# EAGLE board MCU board ATmega328p v3.1 (SN) RevC (EAGLE 9.2.1)
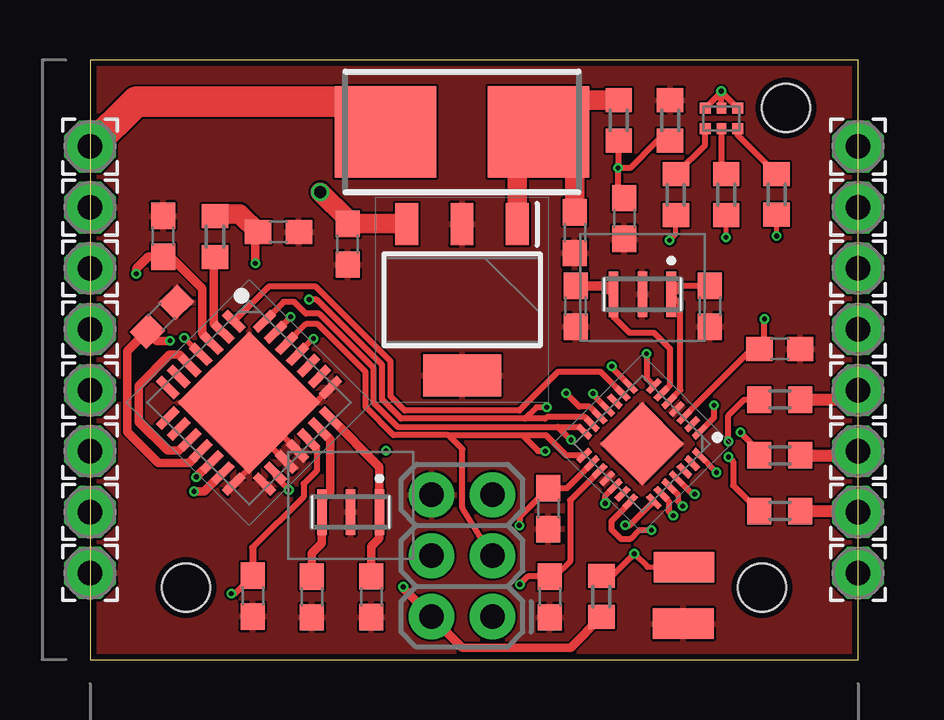
[diagram p0: board, top side]
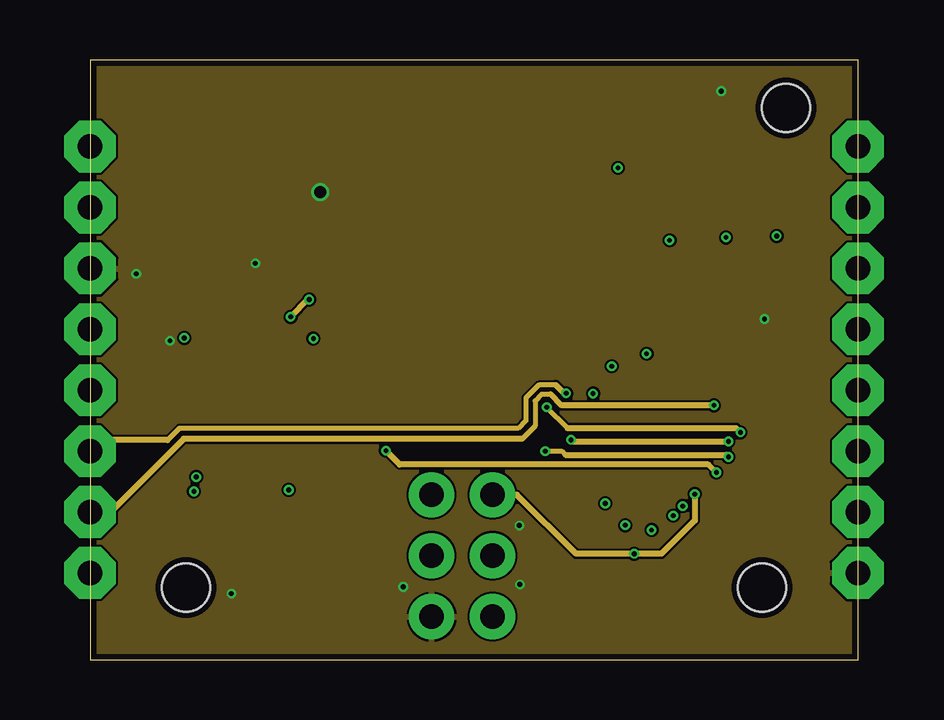
[diagram p1: board, inner layer Route2]
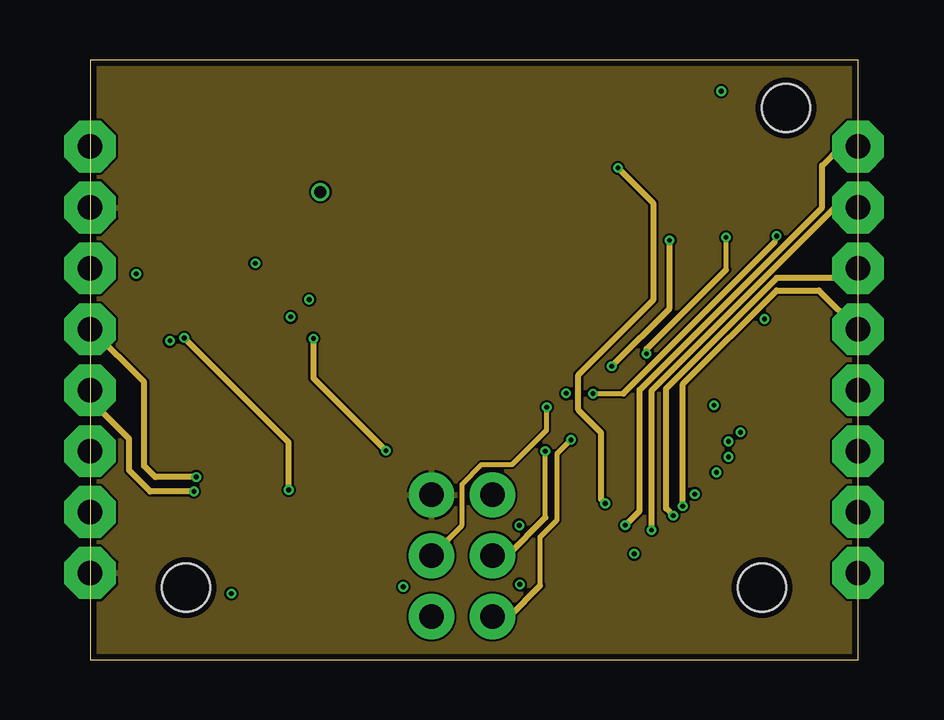
[diagram p2: board, inner layer Route15]
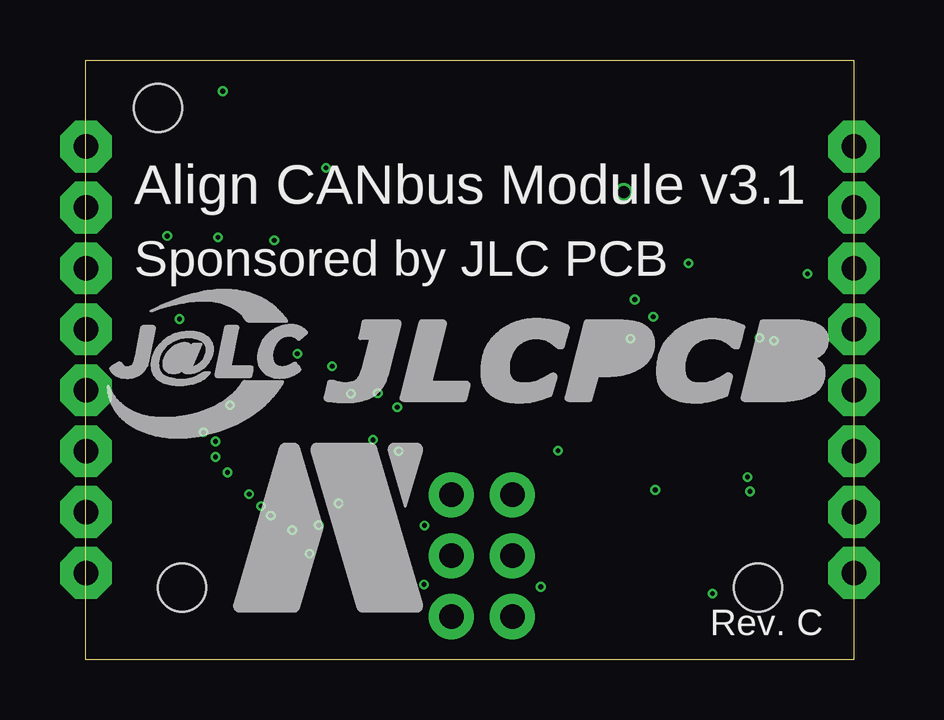
[diagram p3: board, bottom side, seen from below]

Size 32 x 25 mm. Coordinates in mm from the lower left corner, seen from the top.
Outline: 0,0 32,0 32,25 0,25 0,0
Copper layers (1+2*15+16): Top 0.035mm / dielectric 0.365mm / Route2 0.017mm / dielectric 0.365mm / Route15 0.017mm / dielectric 0.365mm / Bottom 0.035mm
Design rules "default *": minimum track width 3.5mil, minimum drill 0.2mm, track to track 3.5mil, track to pad 6mil, pad to pad 6mil, via to via 6mil, smd to smd 6mil, copper to edge 10mil, drill to drill 6mil, minimum pad ring 4mil, minimum via ring 4mil, stop-mask expansion 4mil, vias tented up to drill 25mil, thermal gap 4mil
Holes 2 mm at 28,3 4,3 29,23

## Footprints (pad centres in the part's own frame; a part is rotated, then mirrored left to right if it is on the bottom)
2,15/1,0 = drill 1.016 pad 2.159 octagon: 1 0,0
C0603 = smd 1.1 x 1: 1 -0.85,0; 2 0.85,0
0154001.DRT = smd 4.242 x 3.81: 1 -3.188,0; 2 3.188,0
QFN45P400X400X100-29N = smd 0.7 x 0.25: 1 -2.05,1.35; 2 -2.05,0.9; 3 -2.05,0.45; 4 -2.05,0; 5 -2.05,-0.45; 6 -2.05,-0.9; 7 -2.05,-1.35; 15 2.05,-1.35; 16 2.05,-0.9; 17 2.05,-0.45; 18 2.05,0; 19 2.05,0.45; 20 2.05,0.9; 21 2.05,1.35 | smd 0.25 x 0.7: 8 -1.35,-2.05; 9 -0.9,-2.05; 10 -0.45,-2.05; 11 0,-2.05; 12 0.45,-2.05; 13 0.9,-2.05; 14 1.35,-2.05; 22 1.35,2.05; 23 0.9,2.05; 24 0.45,2.05; 25 0,2.05; 26 -0.45,2.05; 27 -0.9,2.05; 28 -1.35,2.05 | smd 2.45 x 2.45: 29 0,0
SOT230P700X170-4N = smd 1.75 x 0.95: 1 -3.15,2.3; 2 -3.15,0; 3 -3.15,-2.3 | smd 1.75 x 3.25: 4 3.15,0
QFN65P600X600X100-29N = smd 1.05 x 0.35: 1 -2.85,1.95; 2 -2.85,1.3; 3 -2.85,0.65; 4 -2.85,0; 5 -2.85,-0.65; 6 -2.85,-1.3; 7 -2.85,-1.95; 15 2.85,-1.95; 16 2.85,-1.3; 17 2.85,-0.65; 18 2.85,0; 19 2.85,0.65; 20 2.85,1.3; 21 2.85,1.95 | smd 0.35 x 1.05: 8 -1.95,-2.85; 9 -1.3,-2.85; 10 -0.65,-2.85; 11 0,-2.85; 12 0.65,-2.85; 13 1.3,-2.85; 14 1.95,-2.85; 22 1.95,2.85; 23 1.3,2.85; 24 0.65,2.85; 25 0,2.85; 26 -0.65,2.85; 27 -1.3,2.85; 28 -1.95,2.85 | smd 4.2 x 4.2: 29 0,0
2X3-NS = drill 1.016 pad 1.88: 1 -2.54,-1.27; 2 -2.54,1.27; 3 0,-1.27; 4 0,1.27; 5 2.54,-1.27; 6 2.54,1.27
ROHM-1510-(0604) = smd 0.45 x 0.45: 1 -0.675,-0.425; 3 0.675,-0.425; 4 0.675,0.425; 6 -0.675,0.425 | smd 0.4 x 0.45: 2 0,-0.425; 5 0,0.425
R0603 = smd 1 x 1.1: 1 -0.85,0; 2 0.85,0
SMD1,27-2,54 = smd 1.27 x 2.54: 1 0,0
CSTNE16M0V530000R0 = smd 0.4 x 1.9: 1 -1.2,0.425; 2 0,0.425; 3 1.2,0.425

## Placement (x,y rotation side)
5V  5V_V5  [2,15/1,0]  0,16.31 0 top
5V1  5V_H0  [2,15/1,0]  32,3.61 0 top
12V  12V_V7  [2,15/1,0]  0,21.39 0 top
C1  0.1uF  [C0603]  22.27,18.39 270 top
C2  22pF  [C0603]  9.24,2.61 270 top
C3  22pF  [C0603]  25.83,14.73 270 top
C5  22pF  [C0603]  11.72,2.62 270 top
C6  0.1uF  [C0603]  7.85,17.82 0 top
C7  0.1uF  [C0603]  6.78,2.65 270 top
C8  0.1uF  [C0603]  2.99,14.29 45 top
C9  22pF  [C0603]  20.23,14.73 270 top
C10  10uF  [C0603]  20.2,17.8 270 top
C11  10uF  [C0603]  10.73,17.32 270 top
C12  0.1uF  [C0603]  3.05,17.65 90 top
C13  0.1uF  [C0603]  19.16,2.61 270 top
C16  0.1uF  [C0603]  19.1,6.29 270 top
C17  0.1uF  [C0603]  28.75,12.95 0 top
CANH  I/O_CANH_V3  [2,15/1,0]  0,11.23 0 top
CANL  I/O_CANH_V4  [2,15/1,0]  0,13.77 0 top
FUSE  0154005.DRT  [0154001.DRT]  15.5,22 0 top
GND  GND_V6  [2,15/1,0]  0,18.85 0 top
GND30  GND_V0  [2,15/1,0]  0,3.61 0 top
I/O_AD0  I/O_AD0_H7  [2,15/1,0]  32,21.39 0 top
I/O_AD1  I/O_AD1_H6  [2,15/1,0]  32,18.85 0 top
I/O_ADC2_SDA  I/O_ADC2_SDA_H5  [2,15/1,0]  32,16.31 0 top
I/O_ADC3_SCL  I/O_ADC3_SCL_H4  [2,15/1,0]  32,13.77 0 top
IC1  ATMEGA328P-MMH  [QFN45P400X400X100-29N]  23,9 225 top
IC2  MIC5239-5.0YS_TR  [SOT230P700X170-4N]  15.5,15 270 top
IC3  MCP25625-E_ML  [QFN65P600X600X100-29N]  6.63,10.71 315 top
J1  AVR_SPI_PROG_3X2NS  [2X3-NS]  15.5,4.33 90 top
LED1  SMLP36RGB2W3R  [ROHM-1510-(0604)]  26.31,22.56 0 top
MISO  MISO_H3  [2,15/1,0]  32,11.23 0 top
MOSI  MOSI__H2  [2,15/1,0]  32,8.69 0 top
PWM0  PWM0_V2  [2,15/1,0]  0,8.69 0 top
PWM1_INT1  PWM0_INT_V1  [2,15/1,0]  0,6.15 0 top
R1  10kOhm  [R0603]  5.21,17.64 270 top
R2  200Ohm  [R0603]  24.41,19.38 90 top
R3  10kOhm  [R0603]  21.31,2.63 270 top
R4  290Ohm  [R0603]  26.51,19.39 90 top
R5  190Ohm  [R0603]  28.61,19.4 90 top
R6  200Ohm  [R0603]  28.75,6.19 0 top
R7  200Ohm  [R0603]  28.75,10.84 0 top
R8  200Ohm  [R0603]  28.75,8.51 0 top
R9  3kOhm  [R0603]  22.03,22.48 90 top
R10  2kOhm  [R0603]  24.17,22.48 270 top
RES_PAD1  RES_PAD  [SMD1,27-2,54]  24.75,3.86 270 top
RES_PAD2  RES_PAD2  [SMD1,27-2,54]  24.73,1.5 270 top
SCK  SCK_H1  [2,15/1,0]  32,6.15 0 top
U1  CSTNE16M0V530000R0  [CSTNE16M0V530000R0]  10.86,6.58 180 top
U2  CSTNE16M0V530000R0  [CSTNE16M0V530000R0]  23.02,15.66 180 top

## Library data of the parts
5V 5V1 12V CANH CANL GND GND30 I/O_AD0 I/O_AD1 I/O_ADC2_SDA I/O_ADC3_SCL MISO MOSI PWM0 PWM1_INT1 RES_PAD1 RES_PAD2 SCK = wirepad
C1-C3 C5-C13 C16 C17 = eagle-ltspice; SPICEMODEL: NONE; SPICEPREFIX: C
FUSE = 0154005(Fuseholder)DRT; ALLIED_NUMBER: 70184875; ALLIED_PRICE-STOCK: https://www.alliedelec.com/littelfuse-0154005-drt/70184875/; ARROW_PART_NUMBER: 0154005.DRT; ARROW_PRICE-STOCK: https://www.arrow.com/en/products/0154005.drt/littelfuse; DESCRIPTION: Littelfuse 5A T Surface Mount Fuse, 125V ac/dc; HEIGHT: mm; MANUFACTURER_NAME: LITTELFUSE; MANUFACTURER_PART_NUMBER: 0154005.DRT; RS_PART_NUMBER: 2196260P; RS_PRICE-STOCK: http://uk.rs-online.com/web/p/products/2196260P
IC1 = ATMEGA328P-MMH; ARROW_PART_NUMBER: ATMEGA328P-MMH; ARROW_PRICE-STOCK: https://www.arrow.com/en/products/atmega328p-mmh/microchip-technology; DESCRIPTION: Atmel ATMEGA328P-MMH, 8bit AVR Microcontroller, 20MHz, 32 kB Flash, 28-Pin QFN; HEIGHT: 1mm; MANUFACTURER_NAME: Microchip; MANUFACTURER_PART_NUMBER: ATMEGA328P-MMH; RS_PART_NUMBER: 1310272P; RS_PRICE-STOCK: http://uk.rs-online.com/web/p/products/1310272P
IC2 = MIC5239-5.0YS_TR; ARROW_PART_NUMBER: MIC5239-5.0YS TR; ARROW_PRICE-STOCK: http://uk.rs-online.com/web/p/products/7275535P; DESCRIPTION: LDO Regulator Pos 5V 0.5A Micrel MIC5239-5.0YS TR, LDO Voltage Regulator, 500mA, 5 V 1%, 2.3 30 Vin, 3 + Tab-Pin SOT-223; HEIGHT: 1.7mm; MANUFACTURER_NAME: Micrel; MANUFACTURER_PART_NUMBER: MIC5239-5.0YS TR; RS_PART_NUMBER: 7275535P; RS_PRICE-STOCK: http://uk.rs-online.com/web/p/products/7275535P
IC3 = MCP25625-E_ML; ALLIED_NUMBER: 70431541; ALLIED_PRICE-STOCK: http://www.alliedelec.com/microchip-technology-inc-mcp25625-e-ml/70431541/; ARROW_PART_NUMBER: MCP25625-E/ML; ARROW_PRICE-STOCK: https://www.arrow.com/en/products/mcp25625-eml/microchip-technology; DESCRIPTION: CAN Controller with Transceiver QFN28 Microchip MCP25625-E/ML, CAN Controller, 28-Pin QFN; HEIGHT: 1mm; MANUFACTURER_NAME: Microchip; MANUFACTURER_PART_NUMBER: MCP25625-E/ML; RS_PART_NUMBER: 1654104; RS_PRICE-STOCK: http://uk.rs-online.com/web/p/products/1654104
J1 = SparkFun-Connectors
LED1 = SMLP36RGB2W3R; ARROW_PART_NUMBER: SMLP36RGB2W3R; ARROW_PRICE-STOCK: https://www.arrow.com/en/products/smlp36rgb2w3r/rohm-semiconductor; DESCRIPTION: LED,RGB,35/110/35mcd,top-looking,1510 ROHM SMLP36RGB2W3R, SML-P36 Series 3 RGB LED, 475 (Blue) nm, 535 (Green) nm, 629 (Red) nm 6-Pin Milky White; HEIGHT: mm; MANUFACTURER_NAME: ROHM Semiconductor; MANUFACTURER_PART_NUMBER: SMLP36RGB2W3R; RS_PART_NUMBER: 1246884P; RS_PRICE-STOCK: http://uk.rs-online.com/web/p/products/1246884P
R1-R10 = eagle-ltspice; SPICEMODEL: NONE; SPICEPREFIX: R
U1 U2 = CSTNE16M0V530000R0; ARROW_PART_NUMBER: CSTNE16M0V530000R0; ARROW_PRICE-STOCK: https://www.arrow.com/en/products/cstne16m0v530000r0/murata-manufacturing; DESCRIPTION: Resonators 16.0000MHz 15pF SMD CHP Resntr; HEIGHT: 1mm; MANUFACTURER_NAME: Murata Electronics; MANUFACTURER_PART_NUMBER: CSTNE16M0V530000R0

## Nets
5V: 5V1.1 5V.1 C6.1 C7.1 C8.1 C11.1 C12.1 C13.1 C16.1 C17.1 IC1.3 IC1.16 IC1.17 IC2.3 IC3.3 IC3.11 IC3.19 J1.2 LED1.4 LED1.5 LED1.6 R1.1 R3.2
12V_FUSED: C10.1 FUSE.2 IC2.1 R9.2
12V_UNFUSED: 12V.1 FUSE.1
BLUE_LED: IC1.11 R5.1
CAN_CS: IC1.9 IC3.1
CAN_INT: IC1.28 IC3.25
CAN_OSC1: C5.1 IC3.21 U1.1
CAN_OSC2: C2.1 IC3.20 U1.3
CANH: CANH.1 IC3.13
CANL: CANL.1 IC3.12
GND: C1.2 C2.2 C3.2 C5.2 C6.2 C7.2 C8.2 C9.2 C10.2 C11.2 C12.2 C13.2 C16.2 C17.2 GND30.1 GND.1 IC1.4 IC1.18 IC1.29 IC2.2 IC2.4 IC3.14 IC3.15 IC3.17 IC3.18 IC3.22 IC3.29 J1.6 R10.1 RES_PAD2.1 U1.2 U2.2
GREEN_LED: IC1.8 R2.1
I/O_ADC3: I/O_ADC3_SCL.1 IC1.24
I/O_D2_INT: IC1.1 PWM1_INT1.1
I/OAD0: I/O_AD0.1 IC1.22
I/OADC2: I/O_ADC2_SDA.1 IC1.23
MCU_OSC1: C3.1 IC1.5 U2.1
MCU_OSC2: C9.1 IC1.6 U2.3
MISO: IC1.14 IC3.28 J1.1 R7.1
MOSI: IC1.13 IC3.27 J1.4 R8.1
N$1: IC3.2 R1.2
N$2: IC1.12 PWM0.1
N$3: I/O_AD1.1 IC1.21
N$4: LED1.1 R2.2
N$8: LED1.2 R4.2
N$9: LED1.3 R5.2
N$10: R6.2 SCK.1
N$11: MISO.1 R7.2
N$12: MOSI.1 R8.2
RED_LED: IC1.7 R4.1
RESET_MCU: IC1.25 J1.5 R3.1 RES_PAD1.1
RXCAN: IC3.5 IC3.10
SCK: IC1.15 IC3.26 J1.3 R6.1
TXCAN: IC3.4 IC3.16
VOLTAGE_CHECK: C1.1 IC1.19 R9.1 R10.2

## Tracks (layer width: path | path; a pad name or v marks a point on that pad's centre or on a via)
5V  (via drill 0.2, 0.5)
  Top 0.2: IC1.3 24.77,10.14 | 27.57,12.95 C17.1 28.1,13.15 | 2.08,13.38 C8.1 2.38,13.69 | C6.1 6.89,17.71 | 26.3,23.65 v26.3,23.7 | 26.31,23.64 26.3,23.65 | 26.32,23.65 26.3,23.65 | C12.1 3.34,16.8 | C13.1 19.36,3.46
  Top 0.25: 27.57,12.95 24.77,10.14 | 28.1,13.15 v28.1,14.2 | v17.89,5.59 17.9,5.94 C16.1 19.87,7.14 IC1.16 | LED1.6 26.3,23.65 | LED1.5 26.31,23.64 | LED1.4 26.32,23.65 | C13.1 18.24,3.46 v17.91,3.13 | IC1.17 20,6.64 20,4.1 19.36,3.46 | 9.44,8.83 9.44,7.86 8.9,7.32 8.9,6.79 6.78,4.67 | C7.1 6.03,2.75 v5.89,2.75
  Top 0.3: 9.44,8.83 9.12,9.15 IC3.19 | 6.78,4.67 C7.1
  Top 0.35: 6.89,17.71 v6.89,16.52 | v3.33,13.29 2.79,13.29 C8.1 | C12.1 2.42,16.8 1.93,16.31 v1.93,16.08 | IC3.3 4.67,13.59 4.67,15.47 3.34,16.8 | IC3.11 4.13,8.21 2.83,8.21 1.56,9.48 1.56,12.87 2.38,13.69 | R3.2 20.03,0.5 15.52,0.5 J1.2 13.05,2.97 v13.05,3.03
  Top 0.4: R1.1 5.22,18.58
  Top 0.813: IC2.3 13.18,18.17 C11.1 10.73,18.37 v9.6,19.5 | C6.1 6.24,18.58 5.22,18.58
  pour Route2: 0,25 0,0 32,0 32,25
12V_FUSED
  Top 0.2: 20.03,23.33 FUSE.2
  Top 0.5: 17.8,21.11 FUSE.2
  Top 0.813: IC2.1 17.8,21.11 | C10.1 20.2,20.49 FUSE.2 | R9.2 20.03,23.33
12V_UNFUSED
  Top 0.5: 12V.1 0.02,21.37 | 11.04,23.27 FUSE.1
  Top 1.27: 0.02,21.37 1.92,23.27 11.04,23.27
BLUE_LED  (via drill 0.2)
  Top 0.2: 20.96,11.04 v20.96,11.09 | v28.61,17.66 R5.1
  Top 0.25: IC1.11 20.96,11.04
  Route15 0.2: v20.96,11.09 22.22,11.09 | v28.61,17.66 28.52,17.39
  Route15 0.25: 22.22,11.09 28.52,17.39
CAN_CS
  Top 0.25: IC3.1 7.44,15.55 9.41,15.55 12.53,12.43 12.53,10.97 13.12,10.38 17.89,10.38 19.52,12.01 21.26,12.01 IC1.9
CAN_INT  (via drill 0.2)
  Top 0.2: v26.1,7.8 v26.1,7.81 | IC3.25
  Top 0.25: v26.1,7.81 IC1.28 | v9.31,13.38 IC3.25
  Route2 0.2: 25.77,8.13 v26.1,7.8
  Route2 0.25: 25.77,8.13 12.91,8.13 v12.33,8.71
  Route15 0.25: v9.31,13.38 9.31,11.73 v12.33,8.71
CAN_OSC1
  Top 0.2: 10.04,10.07 IC3.21
  Top 0.35: IC3.21 12.06,8.04 U1.1 12.06,5.06 11.72,4.72 C5.1
CAN_OSC2
  Top 0.2: 9.63,9.61 IC3.20
  Top 0.35: IC3.20 10,9.18 10,7 9.66,6.66 U1.3 9.66,4.85 9.24,4.43 C2.1
CANH  (via drill 0.2)
  Top 0.35: IC3.13 4.77,7.01 v4.33,7.01
  Route15 0.2: CANH.1 0,10.83
  Route15 0.25: v4.33,7.01 2.51,7.01 1.63,7.89 1.63,9.2 0,10.83
CANL  (via drill 0.2)
  Top 0.35: IC3.12 v4.43,7.61
  Route15 0.2: CANL.1 0.06,13.77
  Route15 0.25: v4.43,7.61 2.72,7.61 2.26,8.07 2.26,11.57 0.06,13.77
GND
  Top 0.25: IC3.14 7,8.32 7,9 | 7,9 7.42,9 IC3.17 | IC3.18 8,9.34 8,10 | 8,10 7,9 | IC3.22 8.68,10 8,10
  pour Top: 0,25 0,0 32,0 32,25
  pour Route15: 0,25 0,0 32,0 32,25
GREEN_LED  (via drill 0.2)
  Top 0.2: v24.15,17.48 24.41,17.74 R2.1
  Top 0.25: IC1.8 21.74,12.17 v21.74,12.23
  Route15 0.25: v21.74,12.23 24.15,14.64 v24.15,17.48
I/O_ADC3  (via drill 0.2)
  Top 0.2: IC1.24 | 24.5,6.86 24.5,6.6
  Top 0.25: IC1.24 24.5,6.86 | 24.5,6.6 v24.7,6.4
  Route15 0.25: I/O_ADC3_SCL.1 30.37,15.4 28.6,15.4 24.7,11.49 v24.7,6.4
I/O_D2_INT  (via drill 0.2)
  Top 0.25: IC1.1 26,10.09 v26,10.6
  Route2 0.2: 19.19,11.05 18.81,11.05 18.55,10.79 18.55,9.75 18,9.2 | 0.9,6.2 0.05,6.2 PWM1_INT1.1
  Route2 0.25: v26,10.6 19.64,10.6 19.19,11.05 | 18,9.2 3.9,9.2 0.9,6.2
I/OAD0  (via drill 0.2)
  Top 0.25: v22.3,5.6 22.5,5.6 IC1.22
  Route15 0.25: v22.3,5.6 22.9,6.2 22.9,11.25 30.5,18.85 30.5,20.6 31.29,21.39 I/O_AD0.1
I/OADC2  (via drill 0.2)
  Top 0.2: IC1.23 24.11,6.61
  Top 0.25: v24.3,6 24.11,6.19 24.11,6.61
  Route15 0.25: v24.3,6 24,6.3 24,11.3 28.61,15.91 31.6,15.91 I/O_ADC2_SDA.1
MCU_OSC1
  Top 0.2: 24.6,14.85 U2.1
  Top 0.25: C3.1 24.57,15.58 | IC1.5 24.6,11.23 24.6,14.85
  Top 0.4: 24.57,15.58 U2.1
MCU_OSC2
  Top 0.2: U2.3 21.82,14.28
  Top 0.25: 21.82,14.28 22.48,13.62 23.51,13.62 24.16,12.97 24.16,11.44 IC1.6
  Top 0.4: C9.1 21.47,15.58 U2.3
MISO  (via drill 0.2)
  Top 0.25: IC1.14 20.39,9.7 19.5,9.7 | v26.6,9.1 26.6,10.18 27.25,10.84 R7.1 | IC3.28 8.07,14.91 8.51,14.91 9,14.42 9.55,14.42 11.82,12.15 11.82,10.7 12.82,9.7 19.5,9.7 | v20.04,9.16 19.5,9.7
  Route2 0.2: 20.04,9.1
  Route2 0.25: v26.6,9.1 20.04,9.1 v20.04,9.16
  Route15 0.2: J1.1 17.46,1.79 | 18.76,3.09 18.76,5.12 19.45,5.81 19.45,8.57 v20.04,9.16
  Route15 0.25: 18.76,3.09 17.46,1.79
MOSI  (via drill 0.2)
  Top 0.152: v8.36,14.29 8.36,14.28
  Top 0.2: 27.89,8.68 R8.1 | 19.03,10.11 18.96,10.04
  Top 0.25: v27.1,9.47 27.89,8.68 | 18.12,10.04 12.97,10.04 12.17,10.84 12.17,12.29 9.45,15.01 v9.13,15.01 | v19.03,10.52 18.6,10.52 18.12,10.04 | IC1.13 20.91,9.83 20.63,10.11 19.03,10.11 | 18.96,10.04 18.12,10.04 | 8.36,14.28 IC3.27
  Route2 0.152: v9.13,15.01 9.08,15.01
  Route2 0.2: v19.03,10.52 19.9,9.65 | 26.92,9.65 v27.1,9.47
  Route2 0.25: 19.9,9.65 26.92,9.65 | 9.08,15.01 v8.36,14.29
  Route15 0.2: v19.03,10.52 19.03,9.57 17.59,8.13 16.32,8.13 15.5,7.31 15.5,5.6 J1.4
N$1
  Top 0.35: IC3.2 5.17,14.01 5.17,16.75 R1.2
N$2  (via drill 0.2)
  Top 0.25: IC1.12 20.82,10.55 20.39,10.55 v19.84,11.1
  Route2 0.2: v19.84,11.1 19.75,11.1 | 19.41,11.44 18.69,11.44 18.16,10.91 18.16,9.97 17.83,9.64 3.72,9.64 3.24,9.15
  Route2 0.25: 19.75,11.1 19.41,11.44 | 3.24,9.15 0.46,9.15 PWM0.1
N$3  (via drill 0.2)
  Top 0.2: IC1.21 22.5,6.55
  Top 0.25: v23.4,5.4 22.89,5.4 22.53,5.04 22.11,5.04 21.73,5.42 21.73,5.77 22.5,6.55
  Route15 0.25: v23.4,5.4 23.4,11.21 31.04,18.85 I/O_AD1.1
N$4
  Top 0.25: R2.2 25.64,21.45 LED1.1
N$8
  Top 0.2: R4.2 26.31,20.44
  Top 0.25: LED1.2 26.31,20.44
N$9
  Top 0.25: R5.2 26.98,21.88 LED1.3
N$10
  Top 0.5: R6.2 31.96,6.19 SCK.1
N$11
  Top 0.4: 31.61,10.84 MISO.1
  Top 0.5: R7.2 31.61,10.84
N$12
  Top 0.5: R8.2 31.82,8.51 MOSI.1
RED_LED  (via drill 0.2)
  Top 0.2: v26.5,17.6 v26.51,17.61 R4.1
  Top 0.25: v23.19,12.75 23.19,11.71 IC1.7
  Route15 0.2: 26.5,16.26 v26.5,17.6
  Route15 0.25: 26.5,16.26 23.19,12.95 v23.19,12.75
RESET_MCU  (via drill 0.2)
  Top 0.2: 21.75,3.48 R3.1 | 23.23,3.86 RES_PAD1.1
  Top 0.25: IC1.25 25.1,6.9 v25.2,6.9 | 21.75,3.48 v22.68,4.41 23.23,3.86
  Top 0.813: RES_PAD1.1 24.77,3.88
  Route2 0.25: v25.2,6.9 25.2,5.8 23.81,4.41 v22.68,4.41 20.25,4.41 17.79,6.87 J1.5
RXCAN
  Top 0.2: 3.71,8.71 IC3.10 | IC3.10 | 3.71,12.71
  Top 0.35: 3.71,8.71 3.23,8.71 2.03,9.91 2.03,11.41 3.33,12.71 3.71,12.71 IC3.5
SCK  (via drill 0.2)
  Top 0.2: 27.87,6.19 R6.1 | IC3.26
  Top 0.25: 14.94,9.36 15.52,8.78 15.52,6.33 J1.3 | v26.6,8.45 26.8,8.25 26.8,7.26 27.87,6.19 | 14.94,9.36 18,9.36 | 18,9.36 18.99,9.36 19.84,8.51 IC1.15 | 18,9.36 18.67,8.69 v18.97,8.69 | 14.94,9.36 12.64,9.36 11.48,10.52 11.48,12 9.5,13.98 9,13.98 IC3.26
  Route2 0.2: v18.97,8.69 19.65,8.69 19.8,8.53 | 26.52,8.53 v26.6,8.45
  Route2 0.25: 19.8,8.53 26.52,8.53
  Route15 0.2: 18.97,5.92 v18.97,8.69
  Route15 0.25: 18.97,5.92 17.38,4.33 J1.3
TXCAN  (via drill 0.2)
  Top 0.2: IC3.4 v3.93,13.41 | v3.93,13.41
  Top 0.25: IC3.16 7.73,7.62 v8.28,7.07
  Route15 0.25: v3.93,13.41 8.28,9.06 v8.28,7.07
VOLTAGE_CHECK  (via drill 0.2)
  Top 0.2: C1.1 22,19.51 | R9.1 22,21.6 | R10.2 23.63,21.63 | IC1.19
  Top 0.25: 22,19.51 v22,20.5 | 22,21.6 v22,20.5 | 23.63,21.63 22.5,20.5 v22,20.5 | IC1.19 21.47,6.83 v21.47,6.51
  Route15 0.2: v21.47,6.51 21.3,6.68
  Route15 0.25: 21.3,6.68 21.3,9.46 20.35,10.41 20.35,11.87 23.47,14.99 23.47,19.03 v22,20.5

## Text on the board
bPlace: Align CANbus Module v3.1 | Sponsored by JLC PCB | Rev. C